# Altium PCB pow_hw_2_V00.05.PcbDoc
Units mil, origin at the board's own origin, x right, y up, seen from the top; angles counter-clockwise.
Board outline 1770 x 920 mil, 2 copper layers (Top Layer, Bottom Layer); 16 components, 10 nets, 66 pads, 10 vias.
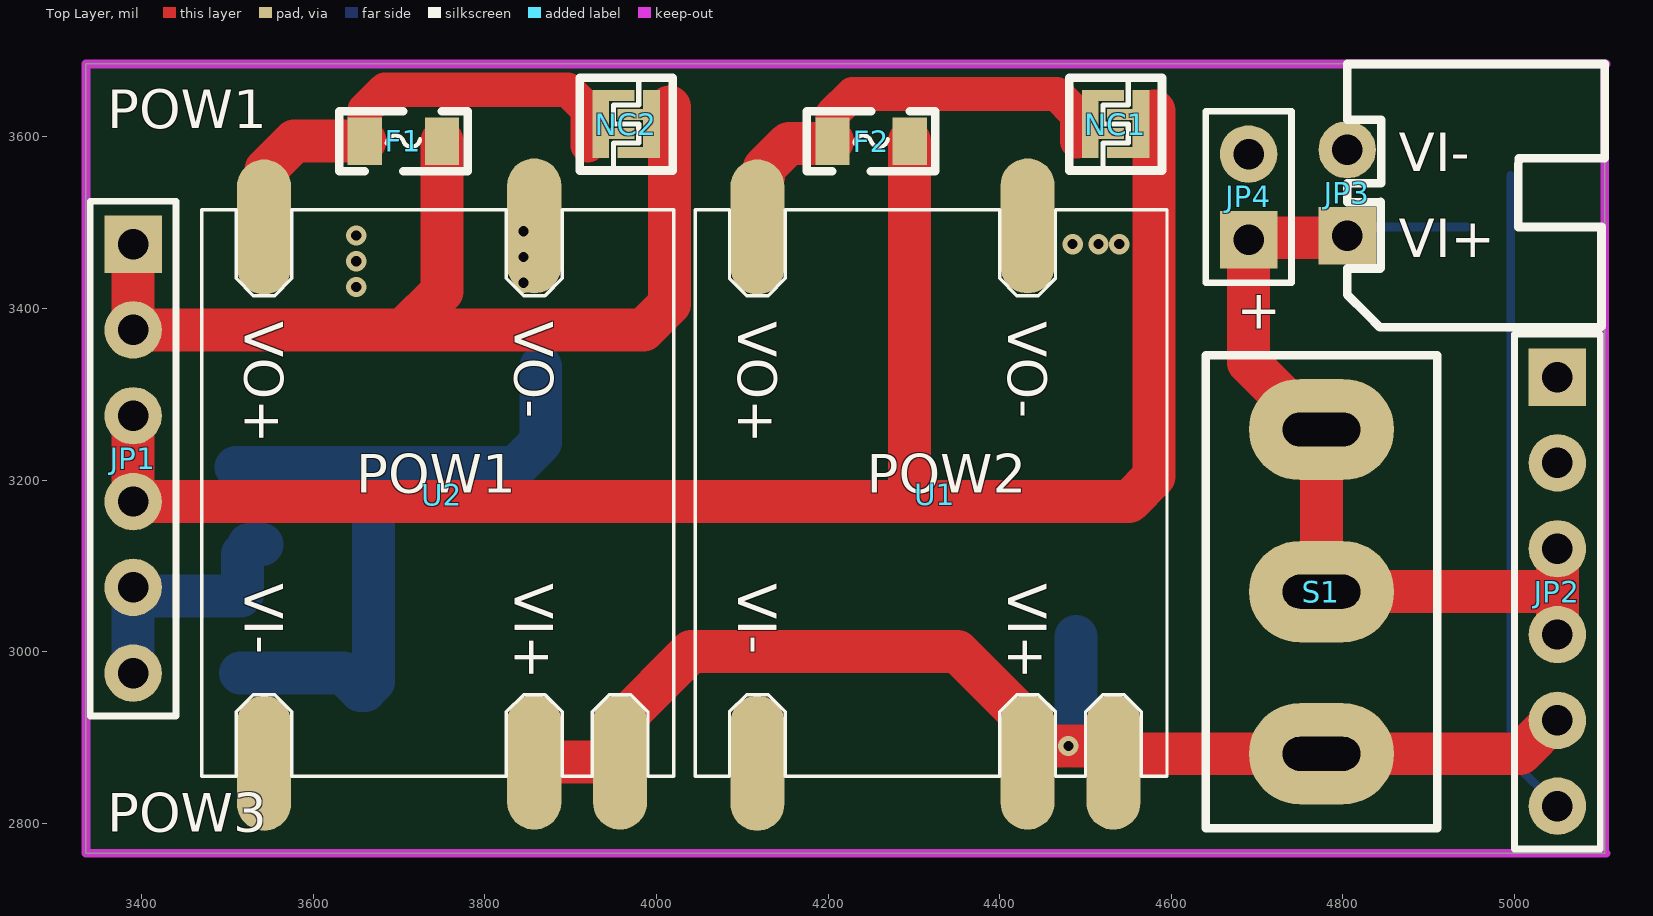
[diagram p0: Top Layer view]
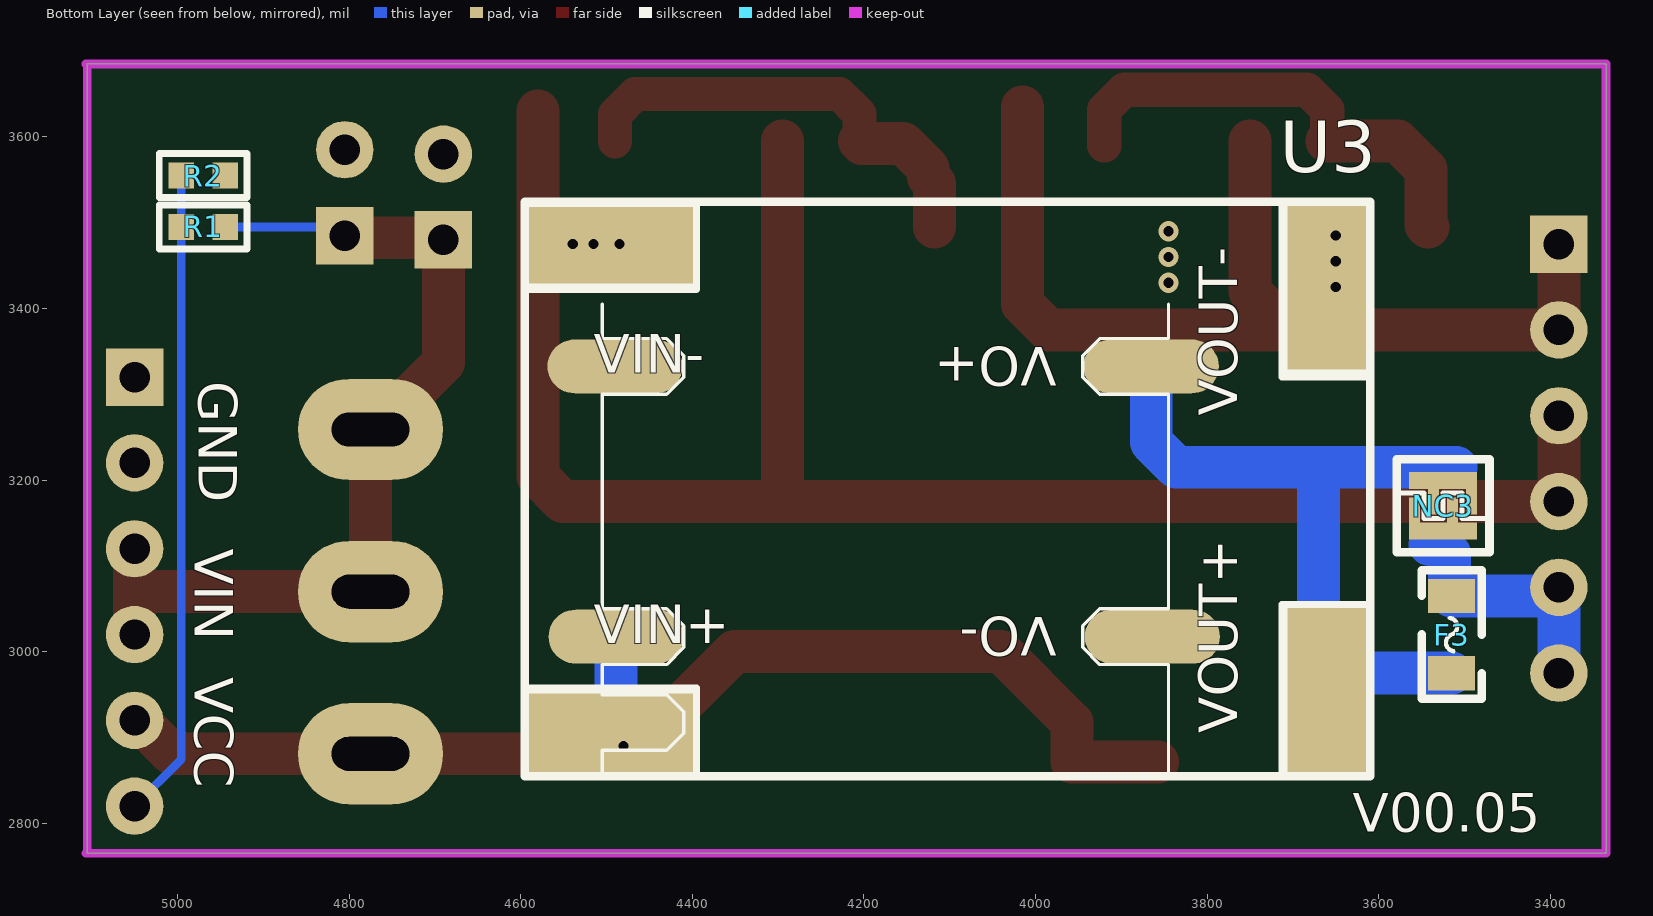
[diagram p1: Bottom Layer view, seen from below]

## Layer stack, top to bottom
Top Solder: solder mask 0.4, Solder Resist, Dk 3.5
Top Layer: signal copper 1.4
Dielectric 1: dielectric 12.6, FR-4, Dk 4.8
Bottom Layer: signal copper 1.4
Bottom Solder: solder mask 0.4, Solder Resist, Dk 3.5

## Board outline
3335,2765 5105,2765 5105,3685 3335,3685

## Design rules (kind name [scope] priority, off if disabled: settings)
Clearance [All] p1: gap=3.94 ignorepadtopadclearanceinfootprint=FALSE
PlaneConnect [All] p1: planeconnectstyle=Direct reliefexpansion=20 reliefentries=4 reliefconductorwidth=10 reliefairgap=10
PolygonConnect [All] p1: connectstyle=Direct reliefconductorwidth=10 reliefentries=4 polygonreliefangle="90 Angle" airgapwidth=10
RoutingVias [All] p1: holewidth=28 width=50 viastyle="Through Hole" minholewidth=28 minwidth=50 maxholewidth=28 maxwidth=50
SolderMaskExpansion [All] p1: expansion=4 istentingtop=FALSE
SupplyNets "Schematic Supply Nets_6" [InNet('12V')] p1: voltage=0.000
SupplyNets "Schematic Supply Nets_4" [InNet('GND')] p2: voltage=0.000
SupplyNets "Schematic Supply Nets_3" [InNet('VOUT_2')] p3: voltage=0.000
SupplyNets "Schematic Supply Nets_2" [InNet('VIN')] p4: voltage=0.000
SupplyNets "Schematic Supply Nets_1" [InNet('VOUT_1')] p5: voltage=0.000
SupplyNets "Schematic Supply Nets" [InNet('VCC')] p6: voltage=0.000
Width [All] p1: maxlimit=100 minlimit=10 preferedwidth=10 minimp=50.000000 maximp=50.000000 favimp=50.000000
29 further rules are at their usual default settings.

## Components (designator, comment, footprint, x,y, rotation, side; value= is the part's Value field where it differs from the comment)
F1 "MSMD200-6V 0.5A" "FU 0805" 3705,3595 r0 top
F2 "MSMD200-6V 0.5A" "FU 0805" 4250,3595 r0 top
F3 "MSMD200-12V 3A" "FU 0805" 3515,3020 r270 bottom
JP1 "HDR-1X6" HDR2.54-LI-6P 3390,3225 r270 top
JP2 "HDR-1X6" HDR2.54-LI-6P 5050,3070 r270 top
JP3 "HDR-1X2" XH2.54-WI-2P 4805,3535 r90 top
JP4 "HDR-1X2" HDR2.54-LI-2P 4690,3530 r90 top
NC1 "Node" NODE-2 4535,3615 r0 top
NC2 "Node" NODE-2 3964.53,3615 r0 top
NC3 "Node" NODE-2 3525,3170 r270 bottom
R1 "2K" "R 0603_L" 4970,3495 r0 bottom
R2 "2K" "R 0603_L" 4970,3555 r180 bottom
S1 "SS-12F23" SS-12D10 4775,3070 r270 top
U1 "temp_dcdc" TEMP_DCDC 4275,3180 r270 top locked
U2 "temp_dcdc" TEMP_DCDC 3700,3180 r270 top locked
U3 "temp_dcdc" TEMP_12V 4090,3130 r180 bottom

## Footprints (in the part's own frame and the unit in brackets; to place one, negate y for a bottom-side part, rotate by r counter-clockwise, add the part's x,y. Pads: shape width x height; smd on the part's side, far side on the other; paste and mask are expansions set on the pad)
"FU 0805" [mil] "贴片保险丝"
  rect 40x55 smd: 1(-45,0) 2(45,0)
  silkscreen extent -75,-35 75,35, body extent -39,-24 39,24, height 20
HDR2.54-LI-2P [mm] "排针，2脚"
  rect 1.7x1.7 hole 0.9: 1(-1.27,0)
  round 1.7 hole 0.9: 2(1.27,0)
  silkscreen extent -2.54,-1.27 2.54,1.27, body extent -2.54,-1.27 2.54,1.27, height 8.5
HDR2.54-LI-6P [mm] "排针，6脚"
  rect 1.7x1.7 hole 0.9: 1(-6.35,0)
  round 1.7 hole 0.9: 2(-3.81,0) 3(-1.27,0) 4(1.27,0) 5(3.81,0) 6(6.35,0)
  silkscreen extent -7.62,-1.27 7.62,1.27, body extent -7.62,-1.27 7.62,1.27, height 8.5
NODE-2 [mm] "2mm大电流节点"
  rect 0.5x2 smd: 1(-0.75,0) 2(0.75,0)
  rect 0.75x0.313 smd: 1(-0.125,-0.281) 1(-0.125,0.844) 2(0.125,-0.844) 2(0.125,0.281)
  silkscreen extent -1.38,-1.38 1.38,1.38
"R 0603_L" [mil] "1/10W贴片电阻"
  rect 30x30 smd: 1(-25.59,0) 2(25.59,0)
  silkscreen extent -51,-26 51,26, body extent -31,-16 31,16, height 16
SS-12D10 [mm] "脚距4.8mm"
  oval 3x4.3 hole 2.3 slot 1 at 0 deg: 1(-4.8,0) 2(0,0) 3(4.8,0)
  silkscreen extent -7,-3.43 7,3.43, body extent -6.71,-3.3 6.71,3.3, height 11.8
TEMP_12V [mm]
  rect 5x2.5 smd paste+0 mask+0.051: 2(-10.287,-5.715) 3(-10.287,8.763)
  oval 4x1.6 smd paste+0 mask+0.051: 2(-10.128,-5.397) 2(-10.128,-2.857) 3(-10.16,5.143) 4(5.714,5.143) 5(5.747,-2.857)
  rect 2.5x5 smd paste+0 mask+0.051: 4(10.922,-4.445) 5(10.922,7.493)
  silkscreen extent -12.83,-6.99 12.19,10.03, body extent -10.5,-6.99 6.18,6.99, height 0.25
TEMP_DCDC [mm] "升降压模块"
  oval 4x1.6 smd paste+0 mask+0.051: 1(7.842,6.54) 2(7.842,4) 3(7.874,-4) 4(-8,-4) 5(-8.033,4)
  silkscreen extent -8.51,-5.84 8.26,8.13, body extent -8.47,-5.84 8.22,8.13, height 0.25
XH2.54-WI-2P [mm] "接插件，2P"
  rect 1.7x1.7 hole 0.9: 1(-1.27,0)
  round 1.7 hole 0.9: 2(1.27,0)
  silkscreen extent -3.99,-7.62 3.81,0, body extent -3.77,-7.35 3.77,0.35, height 5.73

## Part data
F1 F2 F3: library part FU, "贴片保险丝", BOM名称=贴片保险丝, 学习资源=www.ooocke.com, 版权归属=源创客
JP1 JP2: library part "Header 6", "6P接插件", BOM名称=6P接插件, 学习资源=www.ooocke.com, 版权归属=源创客
JP3 JP4: library part "Header 2", "2P接插件", BOM名称=2P接插件, 学习资源=www.ooocke.com, 版权归属=源创客
NC1 NC2 NC3: library part NODE, "大电流节点"
R1 R2: library part 电阻, "贴片电阻1%精度"
S1: library part SSW-1P, "1路拨动开关", BOM名称=波动开关, 学习资源=www.ooocke.com, 版权归属=源创客
U1 U2 U3: "升降压模块"

## Via types
v1: diameter 23.62, hole 11.81, Top Layer to Bottom Layer, 10 vias

## Nets (pads, with @x,y where several pads share a name; then routed paths per layer and width w, separated by ;. In a path a pad name is that pad's centre, name@x,y a point inside that pad or via, vN(x,y) a via of type N, cw(c..) or ccw(c..) an arc to the next point about the centre after c; other vN are vias at no path point)
12V: F3.2 NC3.1 U3.4 | length 887.8
  Bottom Layer w50: 3510,3215 3670,3215 ; F3.2 3635,2975 3655,2955 U3.4@3655,2975 ; U3.4@3660,2955 3670,2965 3670,3215 ; U3.4@3865.04,3332.48 3865.04,3244.29 3835.75,3215 3670,3215
ADC_VIN: JP2.6 R1.2 R2.1 | length 757.5
  Bottom Layer w10: R2.1 R1.2 4995.59,2874.41 JP2.6
GND: JP2.1 JP2.2 JP3.2 JP4.2 R2.2 U1.3 U1.5 U2.3 U2.5 U3.3 U3.5
  other v1: 3650,3425 3845,3430 3650,3455 3845,3460 4485,3475 4515,3475 4539.25,3475 3650,3485 3845,3490
NetF1_2: F1.2 JP1.1 JP1.2 NC2.2 | length 1206.1
  Top Layer w50: JP1.1 JP1.2 3705,3375 ; F1.2 3750,3420 3705,3375 ; 4015,3635 4015,3405 3985,3375 3705,3375
NetF2_2: F2.2 JP1.3 JP1.4 NC1.2 | length 2143.3
  Top Layer w50: JP1.4 JP1.3 ; JP1.4@3394.58,3175 4295,3175 ; F2.2 4295,3175 ; 4580,3630 4580,3204.29 4550.71,3175 4295,3175
NetF3_1: F3.1 JP1.5 JP1.6 NC3.2 | length 308.3
  Bottom Layer w50: JP1.6 JP1.5 3394.58,3075 3404.58,3065 F3.1 3517.5,3067.5 3517.5,3113.88 3525,3121.38 3525,3125 3540,3125
VCC: JP2.5 S1.3 U1.1 U1.2 U2.1 U2.2 U3.2 | length 1471.2
  Top Layer w50: U2.2 U2.1 3957.48,2917.48 4040,3000 4350.98,3000 4428.24,2922.75 U1.2@4428.24,2890 ; U1.2@4447.46,2890 v1(4480,2890) 4526.48,2890 4532.48,2884 4532.48,2881.02 S1.3 5006.44,2881.02 5045.42,2920 JP2.5
  Bottom Layer w50: v1(4480,2890) 4488.74,2898.74 4488.74,2917.52 U3.2@4488.74,3017.52
VIN: JP2.3 JP2.4 JP3.1 JP4.1 R1.1 S1.1 S1.2 | length 1085
  Top Layer w50: JP3.1 4802.5,3482.5 4692.5,3482.5 JP4.1 4690,3336.82 4767.84,3258.98 S1.1 S1.2 5050,3070 ; JP2.4 5050,3070 ; JP2.3 5050,3070
  Bottom Layer w10: JP3.1 4815,3495 R1.1
VOUT_1: F2.1 NC1.1 U1.4 | length 532.1
  Top Layer w40: F2.1 4205,3626.57 4228.43,3650 4466.57,3650 4490,3626.57 4490,3595
  Top Layer w50: U1.4 4117.52,3545.72 4125,3553.2 4125,3563.21 4154.29,3592.5 4202.5,3592.5 F2.1
VOUT_2: F1.1 NC2.1 U2.4 | length 554.4
  Top Layer w40: F1.1 3660,3631.57 3683.43,3655 3896.57,3655 3920,3631.57 3920,3590
  Top Layer w50: U2.4 3545.01,3497.45 3545.01,3562.2 3577.81,3595 F1.1

## Polygon pours and split planes (outlines as drawn)
GND on Top Layer "NONET_L01_P000" (solid, shelved, pour order 0): 3335,2765 5105,2765 5105,3685 3335,3685
GND on Bottom Layer "NONET_L02_P001" (solid, shelved, pour order 1): 3335,2765 5105,2765 5105,3685 3335,3685

## Keep-outs
Keep-Out Layer:
  lines w10: 5105,2765 5105,3685 ; 5106.65,2765 3335,2765 3335,3685 5106.65,3685

## Silkscreen, mask and mechanical layers (free items; w line width, h text height)
Top Overlay:
  text "POW1" at 3360,3610 h45
  text "VI-" at 4865,3560 h45
  text "VI+" at 4865,3460 h45
  text "+" at 4676.25,3376.28 h45
  text "POW1" at 3650,3185 h45
  text "POW2" at 4245,3185 h45
  text "POW3" at 3360,2790 h45
Bottom Overlay:
  text "GND" at 4975,3315 h45 r90
  text "VIN" at 4980,3120 h45 r90
  text "VCC" at 4980,2970 h45 r90
  text "V00.05" at 3630,2790 h45

## Text inside footprints (layer, text, board x,y; h text height)
U1: Top Overlay "VI+" at 4410,3080 h45 r270; Top Overlay "VI-" at 4095,3080 h45 r270; Top Overlay "VO-" at 4410,3385 h45 r270; Top Overlay "VO+" at 4095,3385 h45 r270
U2: Top Overlay "VO+" at 3520,3385 h45 r270; Top Overlay "VO-" at 3835,3385 h45 r270; Top Overlay "VI-" at 3520,3080 h45 r270; Top Overlay "VI+" at 3835,3080 h45 r270
U3: Bottom Overlay "VIN-" at 4515,3325 h45; Bottom Overlay "VIN+" at 4515,3010 h45; Bottom Overlay "VOUT+" at 3765,2905 h45 r270; Bottom Overlay "VOUT-" at 3765,3275 h45 r270; Bottom Overlay "VO-" at 3975,3040 h45 r180; Bottom Overlay "VO+" at 3975,3355 h45 r180